# Altium PCB CFD_2Channel.PcbDoc (part 2 of 2)
Units mil, origin at the board's own origin, x right, y up, seen from the top; angles counter-clockwise.
Board outline 14830 x 9705 mil, 4 copper layers (Top Layer, Top Plane, Bottom Plane, Bottom Layer), stack 61.356 mil thick; 263 components, 220 nets, 1141 pads, 50 vias.
Unrouted connection lines stored in the file: 820.
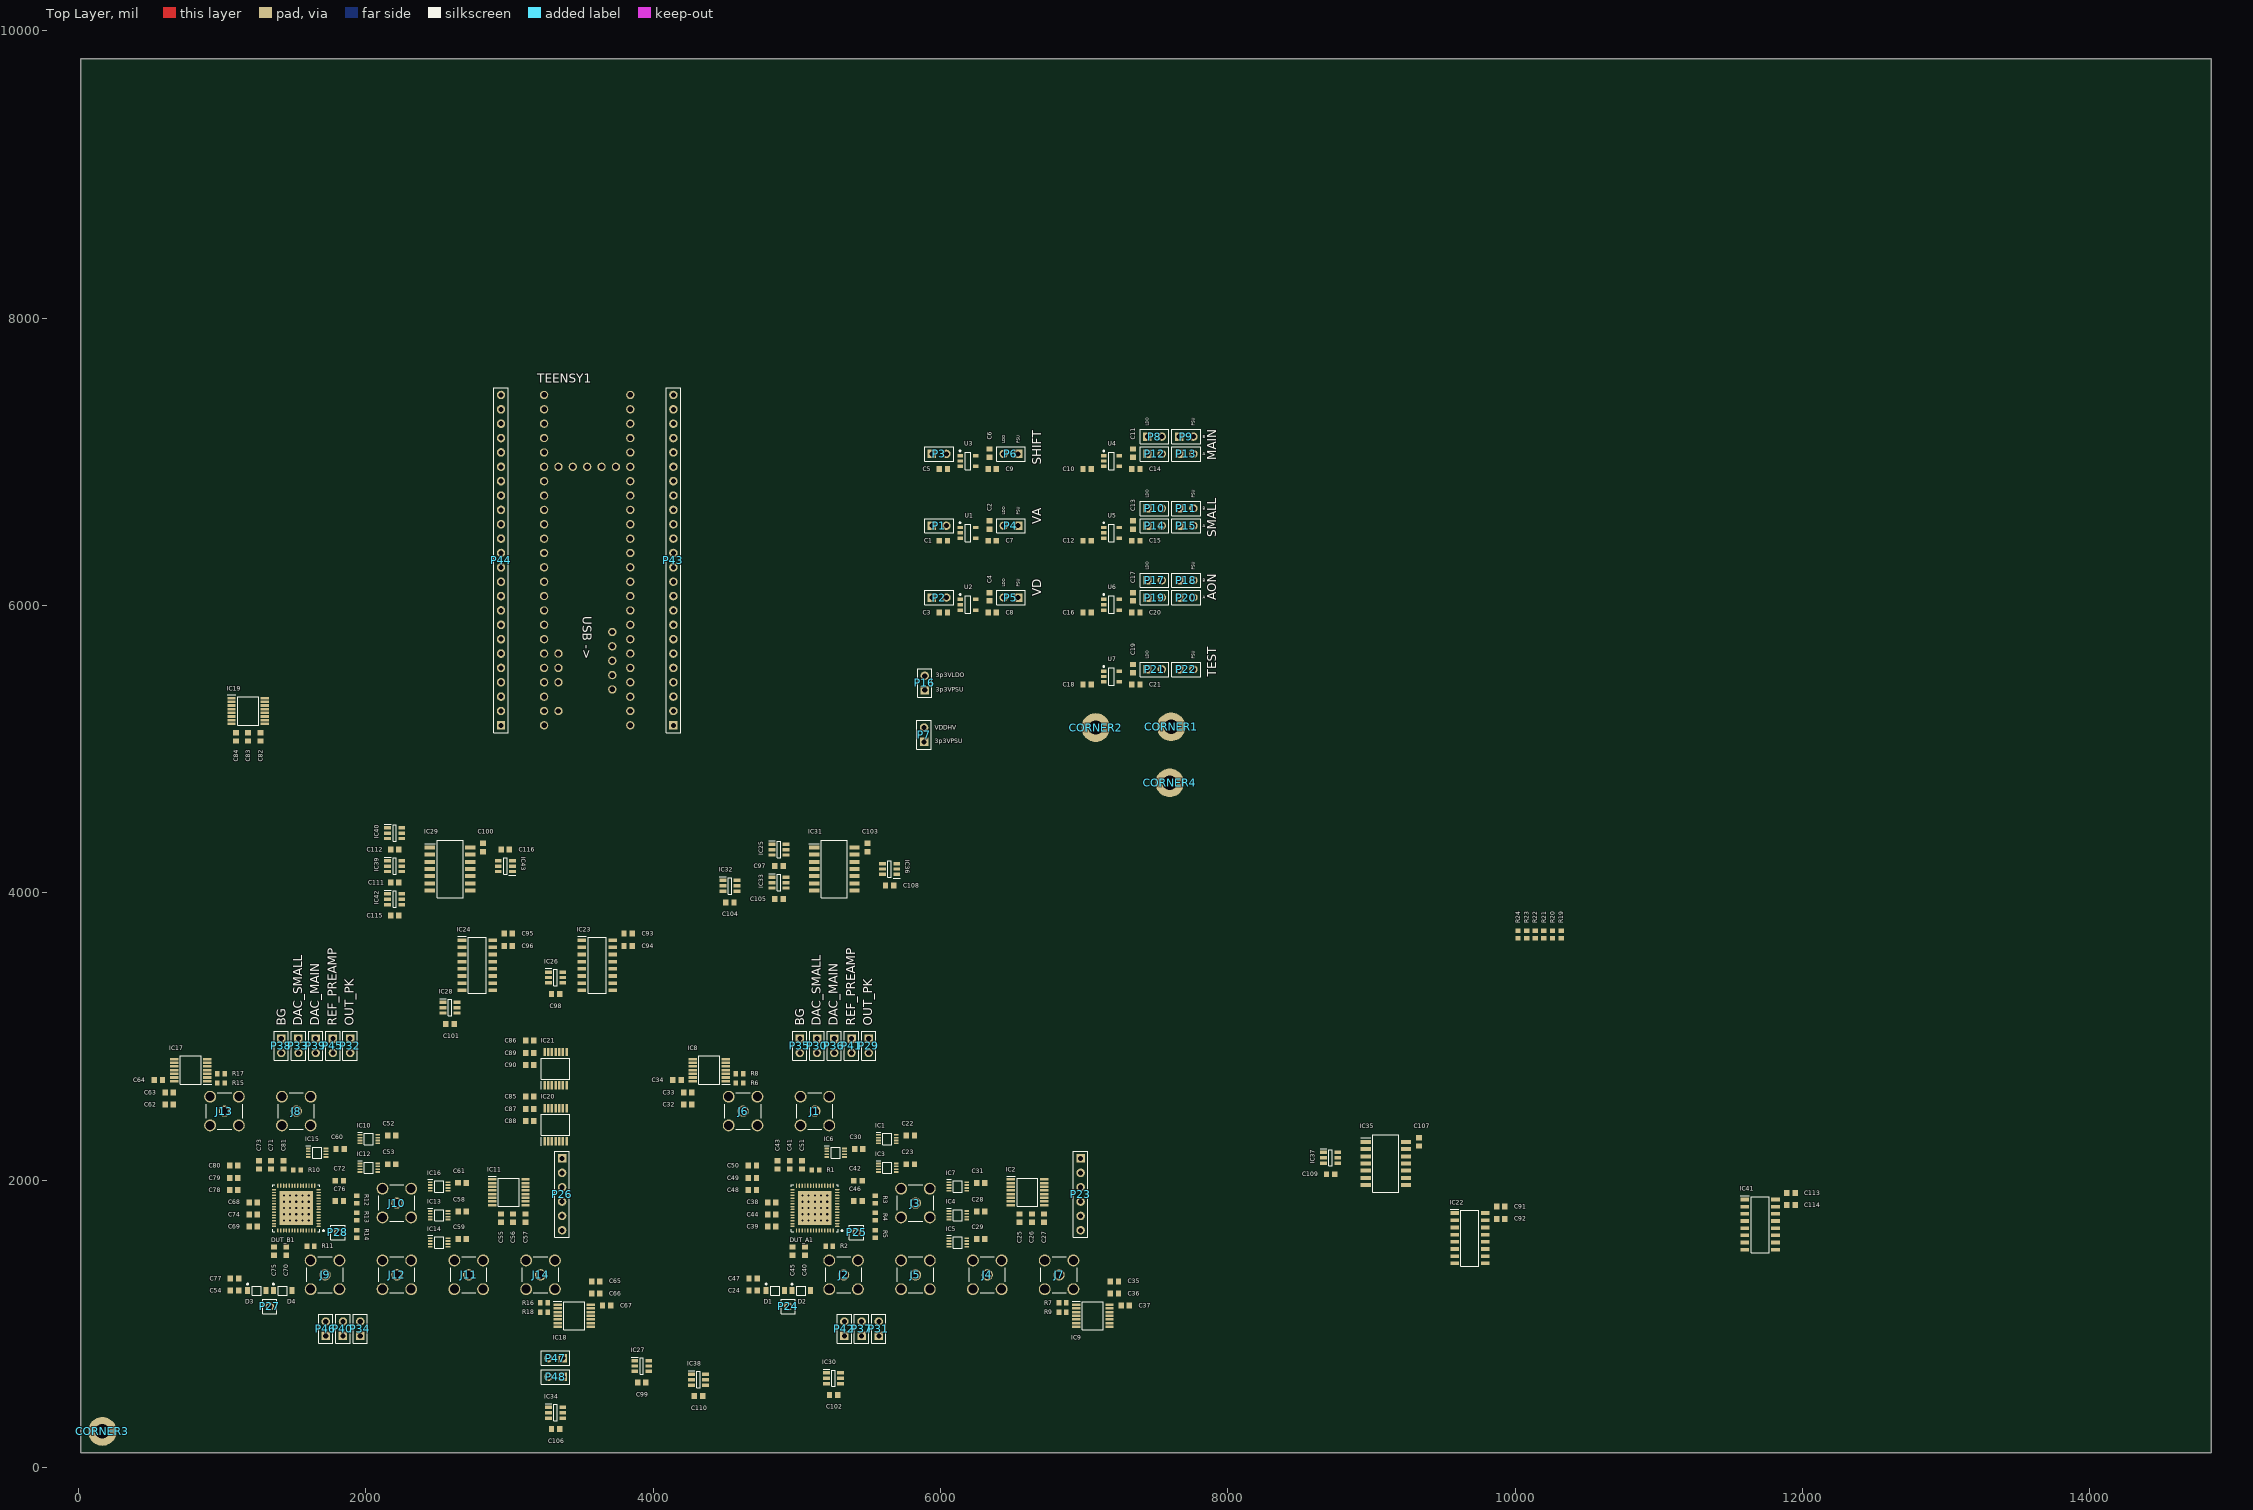
[diagram p0: Top Layer view]

## Silkscreen, mask and mechanical layers (free items; w line width, h text height) (continued)
Top Overlay: (continued)
  text "OUT_PK" at 5524.99,3075 h60 r90